# EAGLE board 3yp_node (EAGLE 9.6.2)
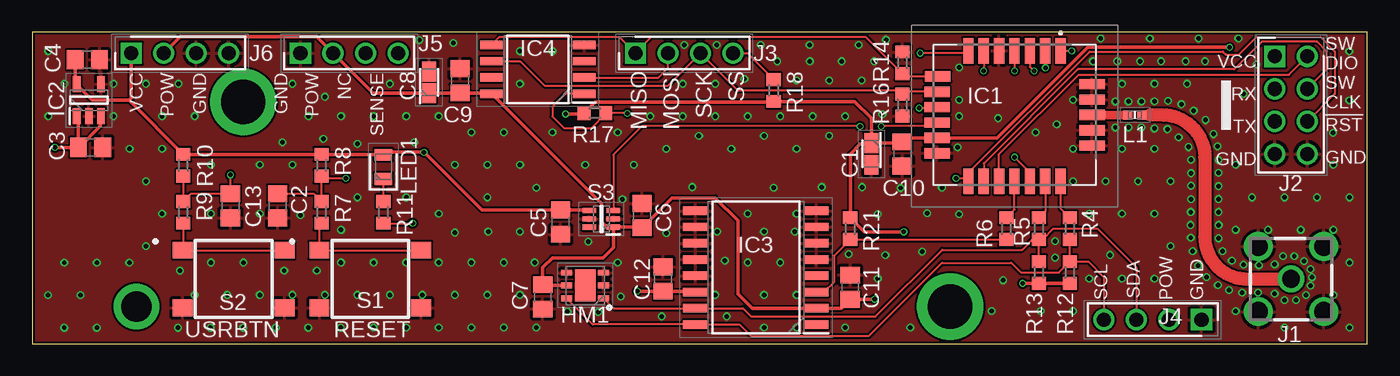
[diagram p0: board, top side]
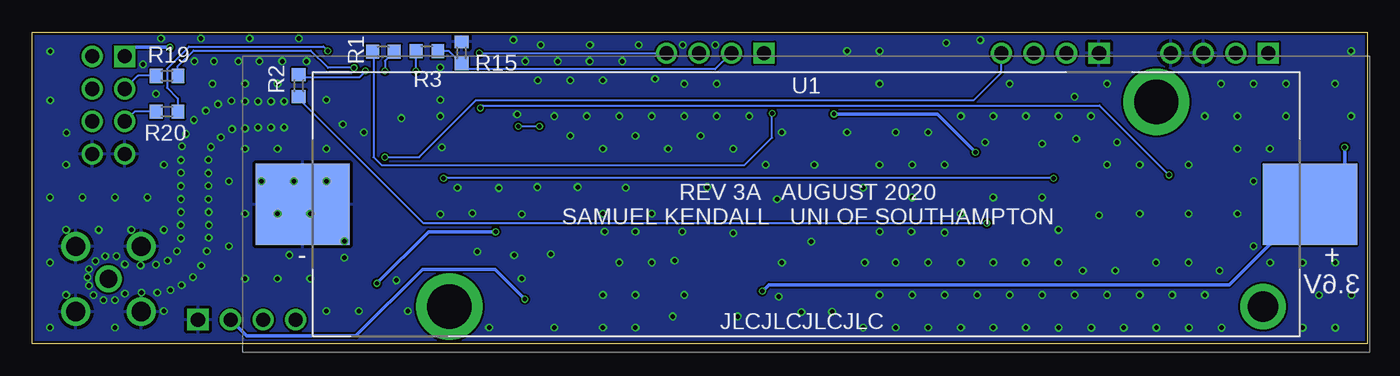
[diagram p1: board, bottom side, seen from below]

Size 104.27 x 24.38 mm. Coordinates in mm from the lower left corner, seen from the top.
Outline: 0,0 104.27,0 104.27,24.38 0,24.38 0,0
Copper layers (1*16): Top 0.035559375mm / dielectric 1.6mm / Bottom 0.035559375mm
Design rules "jlcpcb2layer *": minimum track width 5mil, minimum drill 12mil, track to track 5mil, track to pad 7mil, pad to pad 5mil, via to via 15mil, smd to smd 5mil, copper to edge 8mil, drill to drill 6mil, minimum pad ring 5mil, minimum via ring 3mil, stop-mask expansion 2.5mil, vias tented up to drill 0.35mm, thermal gap 10mil
tRestrict: area 86,17.6 to 86.2,18.2

## Footprints (pad centres in the part's own frame; a part is rotated, then mirrored left to right if it is on the bottom)
CAPPM2014X170N = smd 1.55 x 1.1: 1 -0.85,0; 2 0.85,0
C0805 = smd 1.3 x 1.5: 1 -0.95,0; 2 0.95,0
SON100P300X300X80-7N = smd 0.85 x 0.45: 1 -1.45,1; 2 -1.45,0; 3 -1.45,-1; 4 1.45,-1; 5 1.45,0; 6 1.45,1 | smd 1.6 x 2.5: 7 0,0
ATSAMR30M18AIRM100 = smd 0.8 x 2: J1 -3.6,-5; J2 -2.4,-5; J3 -1.2,-5; J4 0,-5; J5 1.2,-5; J6 2.4,-5; J7 3.6,-5; J14 3.6,5.2; J15 2.4,5.2; J16 1.2,5.2; J17 0,5.2; J18 -1.2,5.2; J19 -2.4,5.2; J20 -3.6,5.2 | smd 2 x 0.8: J8 6,-3; J9 6.05,-1.8; J10 6.05,-0.6; J11 6.05,0.6; J12 6.05,1.8; J13 6.05,3; J21 -6.05,2.4; J22 -6.05,1.2; J23 -6.05,0; J24 -6.05,-1.2; J25 -6.05,-2.4
SOT95P280X110-5N = smd 1.25 x 0.6: 1 -1.25,0.95; 2 -1.25,0; 3 -1.25,-0.95; 4 1.25,-0.95; 5 1.25,0.95
SOIC127P1032X265-16N = smd 1.925 x 0.65: 1 -4.712,4.445; 2 -4.712,3.175; 3 -4.712,1.905; 4 -4.712,0.635; 5 -4.712,-0.635; 6 -4.712,-1.905; 7 -4.712,-3.175; 8 -4.712,-4.445; 9 4.712,-4.445; 10 4.712,-3.175; 11 4.712,-1.905; 12 4.712,-0.635; 13 4.712,0.635; 14 4.712,1.905; 15 4.712,3.175; 16 4.712,4.445
SOIC127P798X216-8N = smd 1.75 x 0.65: 1 -3.625,1.905; 2 -3.625,0.635; 3 -3.625,-0.635; 4 -3.625,-1.905; 5 3.625,-1.905; 6 3.625,-0.635; 7 3.625,0.635; 8 3.625,1.905
19-46-1-TGG_1 = drill 1.4 pad 2.1: 1 0,0 | drill 1.5 pad 2.25: 2 -2.55,2.55; 3 2.55,2.55; 4 -2.55,-2.55; 5 2.55,-2.55
HDRV8W64P254_2X4_1016X508X868P = drill 1.1 pad 1.65 square: 1 0,0 | drill 1.1 pad 1.65: 2 0,2.54; 3 2.54,0; 4 2.54,2.54; 5 5.08,0; 6 5.08,2.54; 7 7.62,0; 8 7.62,2.54
HDRV4W64P0X254_1X4_1016X254X86 = drill 1.1 pad 1.65 square: 1 0,0 | drill 1.1 pad 1.65: 2 2.54,0; 3 5.08,0; 4 7.62,0
INDC1006X60N = smd 0.7 x 0.7: 1 -0.55,0; 2 0.55,0
LEDC2012X110N = smd 0.9 x 1.4: 1 -0.95,0; 2 0.95,0
R0603 = smd 1 x 1.1: 1 -0.85,0; 2 0.85,0
PTS645(SMT) = smd 1.55 x 1.3: 1 -3.975,2.25; 2 3.975,2.25; 3 -3.975,-2.25; 4 3.975,-2.25
SOT65P210X110-6N = smd 1.05 x 0.4: 1 -0.95,0.65; 2 -0.95,0; 3 -0.95,-0.65; 4 0.95,-0.65; 5 0.95,0; 6 0.95,0.65
1042P = drill 3.45 pad 5.175: 1 -27.87,-8; 2 27.33,8 | drill 2.39 pad 3.585: 3 35.66,-8 | smd 7.34 x 6.35: 4 -39.33,0; 5 39.33,0

## Placement (x,y rotation side)
C1  10u  [CAPPM2014X170N]  65.53,14.86 270 top
C2  100n  [C0805]  19.18,10.79 270 top
C3  1u  [C0805]  4.57,15.37 0 top
C4  1u  [C0805]  4.32,22.23 0 top
C5  1u  [C0805]  41.27,9.53 270 top
C6  100n  [C0805]  47.62,10.03 90 top
C7  100n  [C0805]  39.88,3.68 270 top
C8  10u  [CAPPM2014X170N]  30.99,20.45 90 top
C9  100n  [C0805]  33.43,20.57 90 top
C10  100n  [C0805]  67.94,14.86 90 top
C11  100n  [C0805]  63.88,4.45 90 top
C12  100n  [C0805]  49.28,5.08 90 top
C13  100n  [C0805]  15.49,10.79 270 top
HM1  HDC1080DMBT  [SON100P300X300X80-7N]  43.18,4.57 180 top
IC1  ATSAMR30M18A-I_RM100  [ATSAMR30M18AIRM100]  76.71,17.91 180 top
IC2  TPS78233DDCT  [SOT95P280X110-5N]  4.45,19.05 90 top
IC3  DS3231SN#  [SOIC127P1032X265-16N]  56.52,5.97 180 top
IC4  AT25DF321A-SH-B  [SOIC127P798X216-8N]  39.5,21.46 180 top
J1  19-46-1-TGG  [19-46-1-TGG_1]  98.3,5.08 0 top
J2  M20-9980445  [HDRV8W64P254_2X4_1016X508X868P]  97.03,22.48 270 top
J3  M20-9990445  [HDRV4W64P0X254_1X4_1016X254X86]  47.12,22.73 0 top
J4  M20-9990445  [HDRV4W64P0X254_1X4_1016X254X86]  91.31,1.91 180 top
J5  M20-9990445  [HDRV4W64P0X254_1X4_1016X254X86]  20.95,22.73 0 top
J6  M20-9990445  [HDRV4W64P0X254_1X4_1016X254X86]  7.75,22.73 0 top
L1  7.5n  [INDC1006X60N]  86.11,17.91 0 top
LED1  KP-2012CGCK  [LEDC2012X110N]  27.43,13.84 90 top
R1  100  [R0603]  76.83,22.86 180 bottom
R2  100  [R0603]  83.44,20.19 270 bottom
R3  100  [R0603]  73.43,22.89 0 bottom
R4  100  [R0603]  81.03,9.02 90 top
R5  100  [R0603]  78.61,9.02 90 top
R6  100  [R0603]  76.07,9.02 90 top
R7  39R  [R0603]  22.61,10.29 270 top
R8  100k  [R0603]  22.61,13.97 270 top
R9  39R  [R0603]  11.81,10.29 270 top
R10  100k  [R0603]  11.81,13.97 270 top
R11  1k  [R0603]  27.43,10.29 270 top
R12  2k7  [R0603]  81.03,5.59 90 top
R13  2k7  [R0603]  78.61,5.59 90 top
R14  100k  [R0603]  67.94,21.97 90 top
R15  100k  [R0603]  70.74,22.76 90 bottom
R16  100k  [R0603]  67.94,18.67 270 top
R17  100k  [R0603]  43.94,18.03 0 top
R18  100k  [R0603]  57.91,19.81 90 top
R19  1k  [R0603]  93.73,20.95 180 bottom
R20  1k  [R0603]  93.73,18.16 180 bottom
R21  100k  [R0603]  63.88,9.02 270 top
S1  PTS645SM43SMTR92LFS  [PTS645(SMT)]  26.42,5.08 0 top
S2  PTS645SM43SMTR92LFS  [PTS645(SMT)]  15.75,5.08 0 top
S3  SIP32431DR3-T1GE3  [SOT65P210X110-6N]  44.45,9.78 180 top
U1  1042P  [1042P]  43.81,10.92 0 bottom

## Library data of the parts
C1 C8 = SamacSys_Parts; DESCRIPTION: Tantalum Capacitors - Solid SMD 6.3volts 10uF 10% 0805 Low Profile SMD; HEIGHT: 1.7mm; MANUFACTURER_NAME: AVX; MANUFACTURER_PART_NUMBER: TAJP106K006RNJ; MOUSER_PART_NUMBER: 581-TAJP106K006RNJ; MOUSER_PRICE-STOCK: https://www.mouser.com/Search/Refine.aspx?Keyword=581-TAJP106K006RNJ
C2-C7 C9-C13 = rcl; SPICEPREFIX: C
HM1 = SamacSys_Parts; DESCRIPTION: Board Mount Humidity Sensors HDC1080 Low Power, High Accuracy Digital Humidity Sensor with Temperature Sensor 6-WSON -40 to 125; HEIGHT: 0.8mm; MANUFACTURER_NAME: Texas Instruments; MANUFACTURER_PART_NUMBER: HDC1080DMBT; MOUSER_PART_NUMBER: 595-HDC1080DMBT; MOUSER_PRICE-STOCK: https://www.mouser.co.uk/ProductDetail/Texas-Instruments/HDC1080DMBT?qs=8%2FmU9qzJpL%2Fqe%252BNLnJj2sw%3D%3D
IC1 = SamacSys_Parts; DESCRIPTION: Microchip Technology, ATSAMR30M18A-I/RM1; HEIGHT: 2.1mm; MANUFACTURER_NAME: Microchip; MANUFACTURER_PART_NUMBER: ATSAMR30M18A-I/RM100; MOUSER_PART_NUMBER: 556-AMR30M18AIRM100; MOUSER_PRICE-STOCK: https://www.mouser.com/Search/Refine.aspx?Keyword=556-AMR30M18AIRM100; RS_PART_NUMBER: 1840450; RS_PRICE-STOCK: http://uk.rs-online.com/web/p/products/1840450
IC2 = SamacSys_Parts; DESCRIPTION: TPS78233DDCT, Low Dropout Voltage Regulator, 0.15A, 3.3V +/-2%, 2.2 to 5.5Vin, 0.5W, 5-Pin SOT; HEIGHT: 1.1mm; MANUFACTURER_NAME: Texas Instruments; MANUFACTURER_PART_NUMBER: TPS78233DDCT; MOUSER_PART_NUMBER: 595-TPS78233DDCT; MOUSER_PRICE-STOCK: https://www.mouser.co.uk/ProductDetail/Texas-Instruments/TPS78233DDCT?qs=IDSsxkoac0yhGoy0%252BR8zmA%3D%3D
IC3 = SamacSys_Parts; DESCRIPTION: Real Time Clock Serial Maxim DS3231SN# Real Time Clock, Battery Backup, Calendar, Clock, I2C, 5.5 V, 16-Pin SOIC; HEIGHT: 2.65mm; MANUFACTURER_NAME: Maxim Integrated; MANUFACTURER_PART_NUMBER: DS3231SN#; RS_PART_NUMBER: 1897251; RS_PRICE-STOCK: http://uk.rs-online.com/web/p/products/1897251
IC4 = SamacSys_Parts; DESCRIPTION: Flash Memory 32M 2.7-3.6V, 100Mhz Serial Flash; HEIGHT: 2.16mm; MANUFACTURER_NAME: Adesto Technologies; MANUFACTURER_PART_NUMBER: AT25DF321A-SH-B; MOUSER_PART_NUMBER: 556-AT25DF321A-SH-B; MOUSER_PRICE-STOCK: https://www.mouser.com/Search/Refine.aspx?Keyword=556-AT25DF321A-SH-B
J1 = SamacSys_Parts; DESCRIPTION: MULTICOMP - 19-46-1-TGG - RF COAXIAL, SMA, STRAIGHT JACK, 50OHM; HEIGHT: mm; MANUFACTURER_NAME: MULTICOMP; MANUFACTURER_PART_NUMBER: 19-46-1-TGG
J2 = SamacSys_Parts; ALLIED_NUMBER: R1052696; ALLIED_PRICE-STOCK: https://www.alliedelec.com/harwin-m20-9980445/R1052696/; DESCRIPTION: M20 Header, Pin, Dil, Vertical, 4+4 W HARWIN M20 Series, 2.54mm Pitch 8 Way 2 Row Straight Pin Header, Through Hole, Solder Termination; HEIGHT: 8.68mm; MANUFACTURER_NAME: HARWIN; MANUFACTURER_PART_NUMBER: M20-9980445; MOUSER_PART_NUMBER: 855-M20-9980445; MOUSER_PRICE-STOCK: https://www.mouser.com/Search/Refine.aspx?Keyword=855-M20-9980445; RS_PART_NUMBER: 6812941P; RS_PRICE-STOCK: http://uk.rs-online.com/web/p/products/6812941P
J3-J6 = SamacSys_Parts; ALLIED_NUMBER: R1052703; ALLIED_PRICE-STOCK: https://www.alliedelec.com/harwin-m20-9990445/R1052703/; DESCRIPTION: M20 Header, Pin, Sil, Vertical, 4 W HARWIN M20 Series, 2.54mm Pitch 4 Way 1 Row Straight PCB Header, Solder Termination, 3A; HEIGHT: 8.64mm; MANUFACTURER_NAME: HARWIN; MANUFACTURER_PART_NUMBER: M20-9990445; MOUSER_PART_NUMBER: 855-M20-9990445; MOUSER_PRICE-STOCK: https://www.mouser.com/Search/Refine.aspx?Keyword=855-M20-9990445; RS_PART_NUMBER: 6812979P; RS_PRICE-STOCK: http://uk.rs-online.com/web/p/products/6812979P
L1 = SamacSys_Parts; DESCRIPTION: TDK MHQ1005P Series 10 nH +/-5% Ceramic Multilayer SMD Inductor, 0402 Case, SRF: 4.6GHz Q: 23 500mA dc 190m Rdc; HEIGHT: 0.6mm; MANUFACTURER_NAME: TDK; MANUFACTURER_PART_NUMBER: MHQ1005P10NJT; MOUSER_PART_NUMBER: 810-MHQ1005P10NJT; MOUSER_PRICE-STOCK: https://www.mouser.com/Search/Refine.aspx?Keyword=810-MHQ1005P10NJT; RS_PART_NUMBER: 7958243P; RS_PRICE-STOCK: http://uk.rs-online.com/web/p/products/7958243P
LED1 = SamacSys_Parts; DESCRIPTION: Green Chip LED 2.0x1.25mm Kingbright KP-2012CGCK Green LED, 570 nm, 2012 (0805), Rectangle Lens SMD Package; HEIGHT: 1.1mm; MANUFACTURER_NAME: Kingbright; MANUFACTURER_PART_NUMBER: KP-2012CGCK; MOUSER_PART_NUMBER: N/A; MOUSER_PRICE-STOCK: https://www.mouser.com/Search/Refine.aspx?Keyword=N%2FA; RS_PART_NUMBER: 8610037P; RS_PRICE-STOCK: http://uk.rs-online.com/web/p/products/8610037P
R1-R21 = rcl; SPICEPREFIX: R
S1 S2 = SamacSys_Parts; DESCRIPTION: C & K COMPONENTS - PTS645SM43SMTR92LFS - SWITCH, SPST, 0.05A, 12VDC, SMD, 4.3MM; HEIGHT: mm; MANUFACTURER_NAME: C & K COMPONENTS; MANUFACTURER_PART_NUMBER: PTS645SM43SMTR92LFS; MOUSER_PART_NUMBER: 611-PTS645SM43SMTR92; MOUSER_PRICE-STOCK: https://www.mouser.com/Search/Refine.aspx?Keyword=611-PTS645SM43SMTR92
S3 = SamacSys_Parts; DESCRIPTION: VISHAY - SIP32431DR3-T1GE3 - IC, LOAD SWITCH, 1.1V-5.5V, 1A, SC70; HEIGHT: 1.1mm; MANUFACTURER_NAME: Vishay; MANUFACTURER_PART_NUMBER: SIP32431DR3-T1GE3; MOUSER_PART_NUMBER: 781-SIP32431DR3-GE3; MOUSER_PRICE-STOCK: https://www.mouser.com/Search/Refine.aspx?Keyword=781-SIP32431DR3-GE3; RS_PART_NUMBER: 1807353; RS_PRICE-STOCK: http://uk.rs-online.com/web/p/products/1807353
U1 = SamacSys_Parts; DESCRIPTION: KEYSTONE - 1042P - BATTERY HOLDER, 18650, SMD; HEIGHT: 14mm; MANUFACTURER_NAME: Keystone Electronics; MANUFACTURER_PART_NUMBER: 1042P; MOUSER_PART_NUMBER: 534-1042P; MOUSER_PRICE-STOCK: https://www.mouser.com/Search/Refine.aspx?Keyword=534-1042P

## Nets
!PA15_SPI_FLASH_SS: IC4.1 R1.2 R17.2
BATTERY_IN: C3.1 C12.1 IC2.1 IC2.3 IC3.14 U1.5
GND: C1.2 C2.2 C3.2 C4.2 C5.2 C6.2 C7.2 C8.2 C9.2 C10.1 C11.2 C12.2 C13.2 HM1.2 HM1.3 HM1.4 IC1.J5 IC1.J13 IC1.J21 IC1.J22 IC1.J24 IC1.J25 IC2.2 IC2.4 IC3.5 IC3.6 IC3.7 IC3.8 IC3.9 IC3.10 IC3.11 IC3.12 IC3.13 IC4.4 J1.2 J1.3 J1.4 J1.5 J2.7 J2.8 J4.1 J5.1 J6.3 J6.4 R14.2 R15.2 R16.2 S1.3 S1.4 S2.3 S2.4 S3.2 S3.5 U1.4
N$1: R9.2 S2.1 S2.2
N$2: IC1.J4 R1.1
N$3: IC1.J6 R3.1
N$4: IC1.J3 R2.1
N$5: IC1.J17 R6.2
N$6: IC1.J19 R5.2
N$7: IC1.J20 R4.2
N$8: R7.2 S1.1 S1.2
N$9: LED1.1 R11.1
N$10: J1.1 L1.2
N$11: IC1.J2 R19.1
N$12: IC1.J1 R20.1
NRESET: C2.1 IC1.J14 J2.6 R7.1 R8.2
PA06_RTC_INT: IC3.3 R6.1 R21.2
PA07_ANALOG: IC1.J18 J5.4
PA08_I2C_SDA: HM1.1 IC3.15 J4.3 R5.1 R13.2
PA09_I2C_SCL: HM1.6 IC3.16 J4.4 R4.1 R12.2
PA14_USRLED: R2.2 R11.2
PA16_SPI_MISO: IC4.2 J3.2 R3.2 R15.1
PA17_SPI_SS: IC1.J7 J3.4 R18.2
PA18_SPI_MOSI: IC1.J8 IC4.5 J3.1 R14.1
PA19_SPI_SCK: IC1.J9 IC4.6 J3.3 R16.1
PA24_UART_TX: J2.5 R20.2
PA25_UART_RX: J2.3 R19.2
PA27_USRBTN: C13.1 IC1.J10 R9.1 R10.2
PA28_SENSOR_POW: IC1.J11 S3.3
PA30_SWCLK: IC1.J15 J2.4
PA31_SWDIO: IC1.J16 J2.2
SAMR30_RF_OUT: IC1.J23 L1.1
SENSOR_POW: C6.1 C7.1 C8.1 C9.1 C11.1 HM1.5 IC3.2 IC4.8 J4.2 J5.2 J6.2 S3.1
VCC: C1.1 C4.1 C5.1 C10.2 IC1.J12 IC2.5 J2.1 J6.1 LED1.2 R8.1 R10.1 R12.1 R13.1 R17.1 R18.1 R21.1 S3.4

## Tracks (layer width: path | path; a pad name or v marks a point on that pad's centre or on a via)
!PA15_SPI_FLASH_SS  (via drill 0.35)
  Top 0.152: v46.48,18.03 R17.2 44.79,18 43.69,16.89 41.53,16.89 40.64,17.78 40.64,18.54 41.66,19.56 IC4.1
  Bottom 0.152: v46.48,18.03 46.48,16.13 48.64,13.97 76.96,13.97 77.6,14.61 77.6,22.77 R1.2
BATTERY_IN  (via drill 0.35)
  Top 0.254: C3.1 3.62,17.67 IC2.1 | IC2.3 5.33,17.74 5.33,17.02 3.68,15.37 C3.1 | IC3.14 51.74,4.13 C12.1 v47.24,4.13 | v1.78,15.37 C3.1
  Bottom 0.254: v1.78,15.37 1.78,13.63 U1.5 10.77,4.64 46.74,4.64 v47.24,4.13
GND  (via drill 0.35 pad 0.6)
  other vias: 97.03,6.22 97.66,6.86 97.03,3.94 97.79,3.43 98.68,3.43 99.47,3.81 98.55,6.86 99.31,6.48 99.82,5.84 99.82,4.57 99.95,5.21 95.73,4.01 95.78,6.15 72.26,15.37 75.44,17.65 43.43,8 45.72,6.35 46.1,11.3 67.82,12.19 66.4,17.96 30.23,23.75 94.59,6.2 94.49,4.01 93.68,6.5 92.96,7.26 92.63,8.26 92.66,9.3 92.63,10.31 92.63,11.33 92.63,12.34 92.63,13.39 92.63,14.38 92.56,15.44 92.25,16.41 91.62,17.5 90.7,18.24 89.74,18.75 88.7,19 87.63,18.97 86.61,18.95 85.6,18.95 84.58,18.95 87.63,16.84 86.61,16.92 85.6,16.92 84.58,16.92 90.47,8.31 90.45,9.3 90.47,10.31 90.5,11.3 90.5,12.37 90.5,13.36 90.5,14.4 88.65,16.79 90.3,15.39 89.53,16.15 90.63,7.26 93.47,4.22 92.58,4.6 91.69,5.23 91.06,6.12 93.98,8.92 96.52,8.92 99.06,8.92 101.6,8.92 102.87,11.46 100.33,11.46 97.79,11.46 95.25,11.46 93.98,14 101.6,14 102.87,6.38 101.6,3.84 102.87,1.3 97.79,1.3 93.98,2.57 85.09,15.27 87.63,15.27 88.9,12.73 87.63,10.19 88.9,7.65 87.63,5.11 85.09,5.11 84.18,6.96 82.55,5.11 81.28,2.57 78.74,2.57 75.82,4.98 69.49,7.21 66.62,6.93 66.04,5.11 63.75,7.01 63.5,1.3 68.58,1.3 74.93,2.57 59.69,1.3 54.23,2.16 49.17,2.16 44.2,2.49 57.15,3.84 55.88,6.38 57.15,8.79 58.42,6.38 59.56,8.79 59.69,3.84 53.49,8.79 53.34,3.84 54.1,6.5 49.53,8.66 45.97,3.71 41.81,2.51 39.37,1.3 36.83,1.3 34.29,1.3 31.75,1.3 29.21,1.3 26.67,1.3 24.1,1.27 21.56,1.27 19.02,1.27 16.48,1.27 13.94,1.27 11.4,1.27 7.59,6.35 5.05,6.35 3.78,3.81 5.05,1.27 2.51,1.27 1.24,3.81 2.51,6.35 27.94,3.84 25.4,3.84 22.86,3.84 20.32,3.84 17.78,3.84 15.24,3.84 12.7,3.84 30.48,3.84 33.02,3.84 35.56,3.84 38.1,3.84 20.32,14 17.78,14 13.97,14 13.97,10.19 17.78,10.19 20.95,10.06 6.35,17.81 7.62,15.27 10.16,15.27 8.89,12.73 10.16,10.19 8.89,7.65 11.56,5.74 1.27,17.81 2.54,20.35 1.27,22.89 6.35,20.35 8.89,20.35 10.16,17.81 11.43,20.35 12.7,17.81 20.32,20.35 22.86,19.33 27.94,20.35 32.89,23.52 38.1,20.35 40.64,22.89 38.1,22.89 50.8,20.35 53.34,20.35 64.54,23.37 60.71,23.37 56.9,23.37 58.19,22.1 60.73,22.1 63.22,22.1 65.76,22.1 59.69,20.6 62.23,20.6 64.77,20.6 21.59,17.81 19.56,15.77 24.13,17.81 26.67,17.81 29.21,17.81 31.75,17.81 25.4,15.65 22.73,16.03 29.84,15.77 34.29,16.54 35.56,14 36.83,16.54 38.1,14 33.02,14 43.18,14 40.64,16.54 45.72,16.54 46.99,14 49.53,15.27 52.07,16.28 57.15,16.28 54.61,15.27 59.69,15.27 62.23,16.28 48.26,17.81 50.8,17.81 53.34,17.81 55.88,17.81 58.42,17.81 60.96,17.81 63.5,17.81 55.88,10.19 59.69,10.19 57.91,12.22 51.54,12.27 61.67,12.27 57.15,1.3 64.82,12.27 69.9,10.21 66.01,10.13 72.39,10.13 71.04,12.22 78.36,16.54 72.39,19.08 72.39,17.81 72.39,21.62 66.67,23.77 83.44,23.88 87.27,23.88 91.08,23.88 94.18,23.88 85.09,20.35 87.63,20.35 90.17,20.35 94.59,19.56 102.84,22.86 102.84,19.05 101.57,16.51 95.61,21.84 81.28,15.27 81.28,19.08 80.01,17.17 33.02,8.71 34.29,6.38 35.61,8.79 36.83,6.38 38.07,8.79 39.24,6.38 31.75,6.38 29.21,6.38 26.67,6.38 24.13,6.38 13.97,6.38 16.51,6.38 19.68,5.74 22.23,5.74 25.4,11.46 24.13,8.92 29.21,11.46 31.75,10.19 35.56,11.46 39.37,12.22 55.63,20.73 50.93,23.37 53.47,23.37 79.88,8.03 79.88,6.76 86.36,12.73 83.82,12.73 81.28,12.73 85.09,10.19 82.55,10.19 86.51,22.1 84.73,22.1 82.83,22.1 88.16,22.1 90.07,22.1 91.59,22.1
  pour Top (isolate 0.152): -3.56,50.93 -3.56,-7.62 113.41,-7.62 113.41,50.93
  pour Bottom (isolate 0.152): 107.19,49.53 107.19,-9.14 -5.71,-9.14 -5.71,49.53
N$1
  Top 0.152: S2.2 S2.1 11.81,7.37 R9.2
N$2  (via drill 0.35)
  Top 0.152: IC1.J4 v76.71,21.34
  Bottom 0.152: R1.1 76.71,22.14 v76.71,21.34
N$3  (via drill 0.35)
  Top 0.152: IC1.J6 v74.31,21.35 v74.3,21.34
  Bottom 0.152: v74.3,21.34 74.3,22.87 R3.1
N$4  (via drill 0.35)
  Top 0.152: IC1.J3 77.91,21.66 v78.23,21.34
  Bottom 0.152: v78.23,21.34 78.74,20.83 83.22,20.83 R2.1
N$5
  Top 0.152: R6.2 76.71,10.5 IC1.J17
N$6
  Top 0.152: IC1.J19 79.11,10.36 R5.2
N$7
  Top 0.152: IC1.J20 80.31,10.59 R4.2
N$8
  Top 0.152: R7.2 22.44,9.27 S1.1 S1.2
N$9
  Top 0.152: R11.1 LED1.1
N$10
  Top 0.406: L1.2 87.29,17.91
  Top 1.016: 87.29,17.91 88.27,17.91 arc-90 91.57,14.61 91.57,8.38 arc90 94.87,5.08 J1.1
N$11  (via drill 0.35)
  Top 0.152: IC1.J2 79.12,22.89 v79.12,21.59
  Bottom 0.152: v79.12,21.59 81.15,21.59 82.5,22.94 91.66,22.94 92.88,21.72 R19.1
N$12  (via drill 0.35)
  Top 0.152: IC1.J1 v81.18,22.91
  Bottom 0.152: v81.18,22.91 81.51,23.24 92,23.24 93.73,21.51 93.73,20.03 92.88,19.18 R20.1
NRESET  (via drill 0.35)
  Top 0.152: C2.1 22,11.74 R7.1 R8.2 22.77,12.95 v24.51,12.95 | v72.14,12.95 72.86,12.95 IC1.J14 73.11,13.39 82.58,22.86 92.99,22.86 93.25,22.6 94.22,22.6 95.61,23.98 100.61,23.98 101.73,22.86 101.73,19.56 J2.6
  Bottom 0.152: v24.51,12.95 v72.14,12.95
PA06_RTC_INT
  Top 0.152: IC3.3 61.85,4.06 62.61,4.83 62.61,6.9 R21.2 R6.1
PA07_ANALOG  (via drill 0.35)
  Top 0.152: IC1.J18 77.91,13.4 v76.71,14.61
  Bottom 0.152: v76.71,14.61 74.04,14.61 69.6,19.05 30.73,19.05 28.57,21.21 J5.4
PA08_I2C_SDA
  Top 0.152: HM1.1 45.41,2.79 IC3.15 55.5,2.79 56.13,2.16 65.86,2.16 71.07,7.37 77.3,7.37 78.11,8.17 R5.1 | R13.2 R5.1 | R5.1 78.91,8.17 79.76,9.02 83.19,9.02 86.23,5.97 J4.3
PA09_I2C_SCL
  Top 0.152: HM1.6 43.78,1.52 IC3.16 55.24,1.52 56.13,0.64 65.33,0.64 71.04,6.35 76.45,6.35 77.22,5.59 80.18,5.59 R12.2 | R12.2 R4.1 | R12.2 82.46,6.44 83.69,5.21 J4.4
PA14_USRLED  (via drill 0.35)
  Top 0.152: R11.2 v29.72,9.44
  Bottom 0.152: v29.72,9.44 73.7,9.44 83.44,19.18 R2.2
PA16_SPI_MISO
  Top 0.152: IC4.2 48.9,20.83 49.66,21.59 J3.2
  Bottom 0.152: J3.2 50.93,21.46 70.29,21.46 R15.1 71.72,22.89 R3.2
PA17_SPI_SS  (via drill 0.35)
  Top 0.152: R18.2 55.84,22.73 J3.4 | IC1.J7 72.93,22.73 v69.34,22.73
  Bottom 0.152: v69.34,22.73 J3.4
PA18_SPI_MOSI
  Top 0.152: IC1.J8 68.16,20.91 R14.1 65.06,24 48.39,24 J3.1 45.85,24 36.51,24 IC4.5
PA19_SPI_SCK
  Top 0.152: IC4.6 38.1,22.1 40.01,20.19 49.66,20.19 J3.3 55.14,19.79 67.67,19.79 R16.1 68.13,19.71 IC1.J9
PA24_UART_TX
  Bottom 0.152: R20.2 96.27,18.16 J2.5
PA25_UART_RX
  Bottom 0.152: R19.2 96.01,20.95 J2.3
PA27_USRBTN  (via drill 0.35)
  Top 0.152: R10.2 R9.1 12.42,11.74 C13.1 v15.49,13.21 | IC1.J10 70.59,18.44 v69.27,18.44
  Bottom 0.152: v15.49,13.21 20.93,18.64 69.06,18.64 v69.27,18.44
PA28_SENSOR_POW  (via drill 0.35)
  Top 0.152: IC1.J11 70.37,17.02 v66.29,17.02 | v64.64,17.02 47.62,17.02 45.4,14.79 S3.3
  Bottom 0.152: v66.29,17.02 v64.64,17.02
PA30_SWCLK
  Top 0.152: IC1.J15 74.31,14.11 81.66,21.46 93.85,21.46 96.01,23.62 100.33,23.62 101.09,22.86 101.09,21.46 J2.4
PA31_SWDIO
  Top 0.152: IC1.J16 75.51,14.83 81.72,21.04 98.13,21.04 J2.2
SAMR30_RF_OUT
  Top 0.66: IC1.J23 L1.1
SENSOR_POW  (via drill 0.35)
  Top 0.254: HM1.5 39.94,4.57 C7.1 39.88,5.97 40.64,6.73 44.58,6.73 45.4,7.55 S3.1 | S3.1 44.85,9.13 44.45,9.53 44.45,10.98 IC4.8 35.81,19.62 C9.1 33.4,19.6 C8.1 26.63,19.6 J5.2 22.23,24 11.56,24 J6.2 | v65.79,3.5 C11.1 63.18,2.79 IC3.2 56.26,2.79 55.12,3.94 55.12,9.65 53.34,11.43 49.97,11.43 C6.1 47.58,9.13 S3.1
  Bottom 0.254: v65.79,3.5 68.13,5.84 73.79,5.84 78.99,0.64 87.5,0.64 J4.2
VCC  (via drill 0.35)
  Top 0.254: C1.1 67.84,15.71 C10.2 68.24,16.11 IC1.J12 75.34,16.11 82.42,23.19 v93.5,23.19 | IC2.5 3.45,20.34 | 3.45,20.34 3.37,20.43 C4.1 | 7.58,19.05 R10.1 R8.1 27.41,14.82 LED1.2 27.62,14.99 v30.61,14.99 v30.62,14.99 35.13,10.47 C5.1 43.45,10.47 S3.4 | 7.58,19.05 4.7,19.05 3.45,20.3 3.45,20.34 | C1.1 65.53,17.65 64.22,18.96 R18.1 57.86,18.91 43.97,18.91 R17.1 43.03,17.97 v41.66,17.97 | R12.1 R13.1 v77.34,4.74 | C1.1 65.44,15.62 64.64,15.62 63.88,14.86 R21.1 64.98,8.76 v68.07,8.76 | 7.58,19.05 7.75,19.22 J6.1
  Bottom 0.254: v77.34,4.74 73.32,8.76 v68.07,8.76 | v93.5,23.19 96.32,23.19 J2.1 | v30.61,14.99 33.59,17.97 v41.66,17.97

## Text on the board
tPlace: VCC | VCC | POW | GND | GND | POW | NC | SENSE | MISO | MOSI | SCK | SS | SW / DIO | RX | SW / CLK | TX | !RST | GND | GND | SDA | SCL | POW | GND | USRBTN | RESET
bPlace: REV 3A AUGUST 2020 / SAMUEL KENDALL UNI OF SOUTHAMPTON | - | + / 3.6V | JLCJLCJLCJLC